# Altium PCB PCB2.PcbDoc
Units mil, origin at the board's own origin, x right, y up, seen from the top; angles counter-clockwise.
Board outline 1610.03 x 1165.03 mil, 2 copper layers (Top Layer, Bottom Layer); 17 components, 12 nets, 50 pads, 0 vias.
Unrouted connection lines stored in the file: 2.
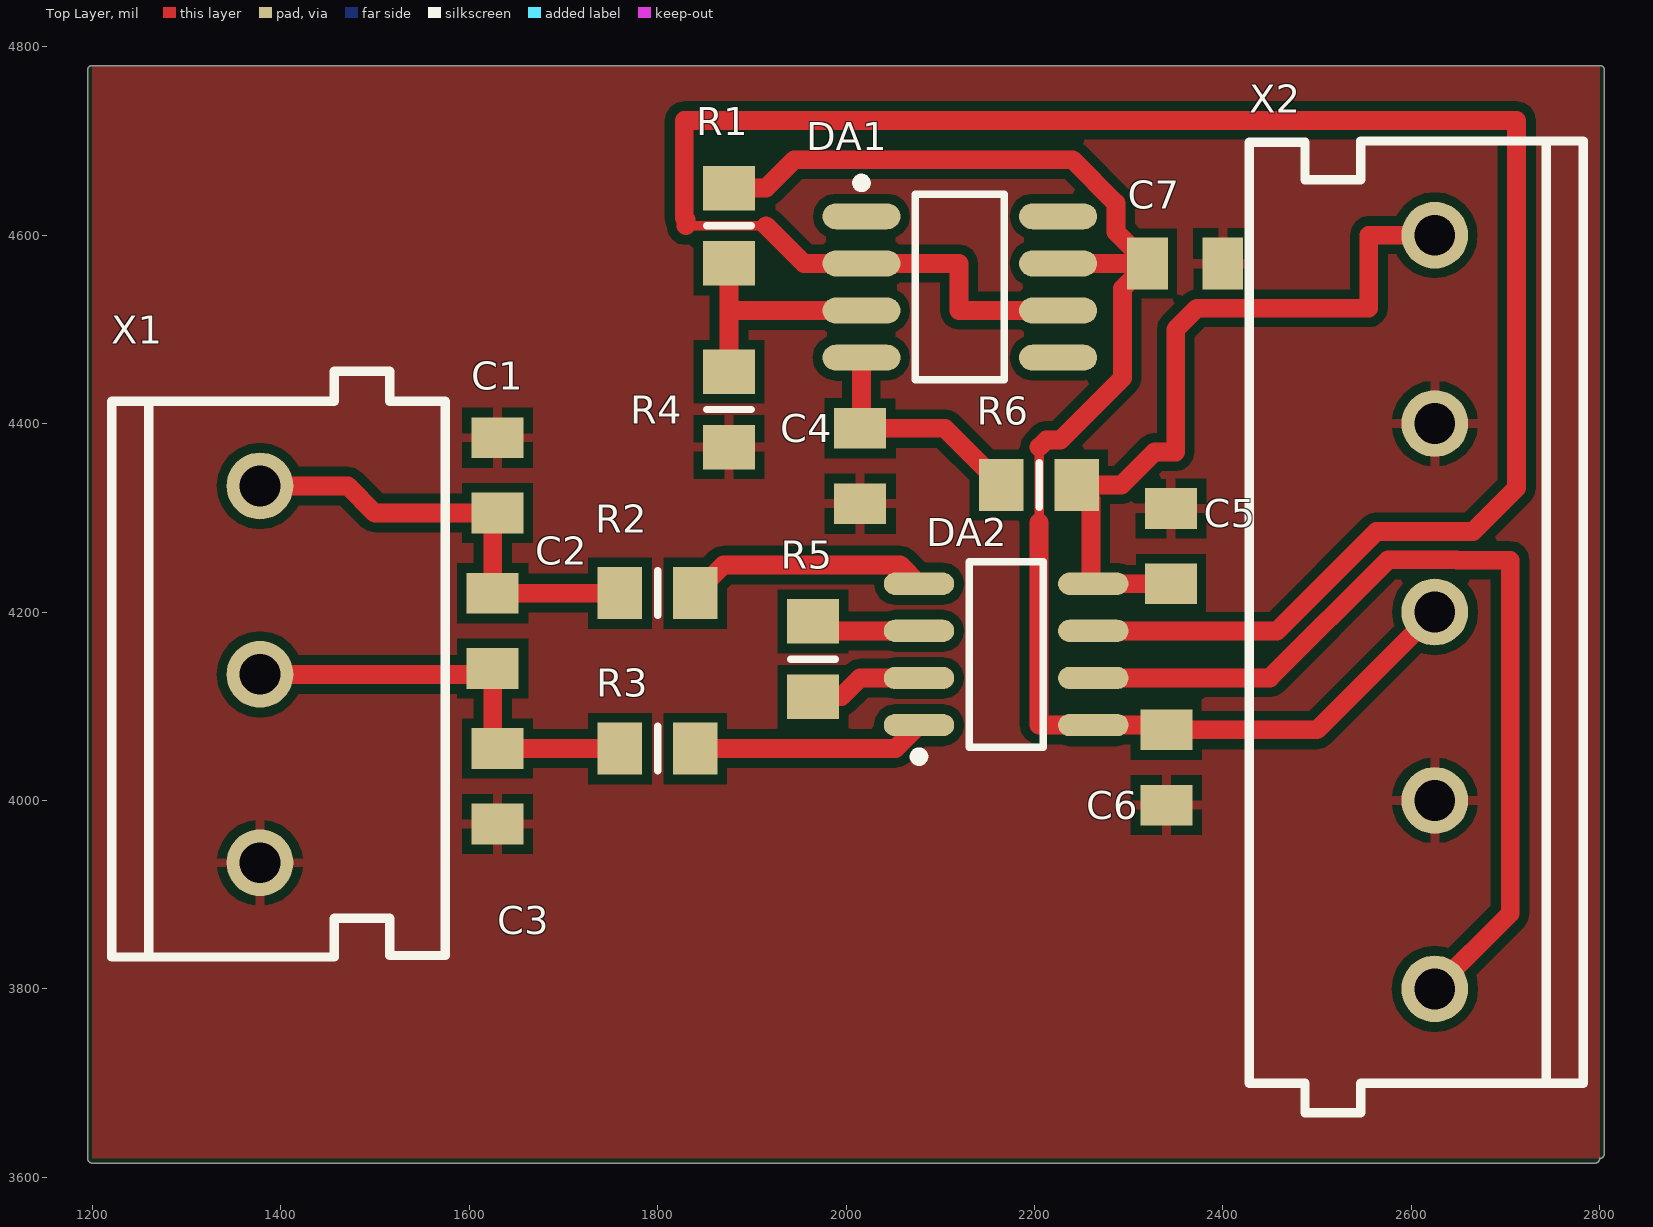
[diagram p0: Top Layer view]
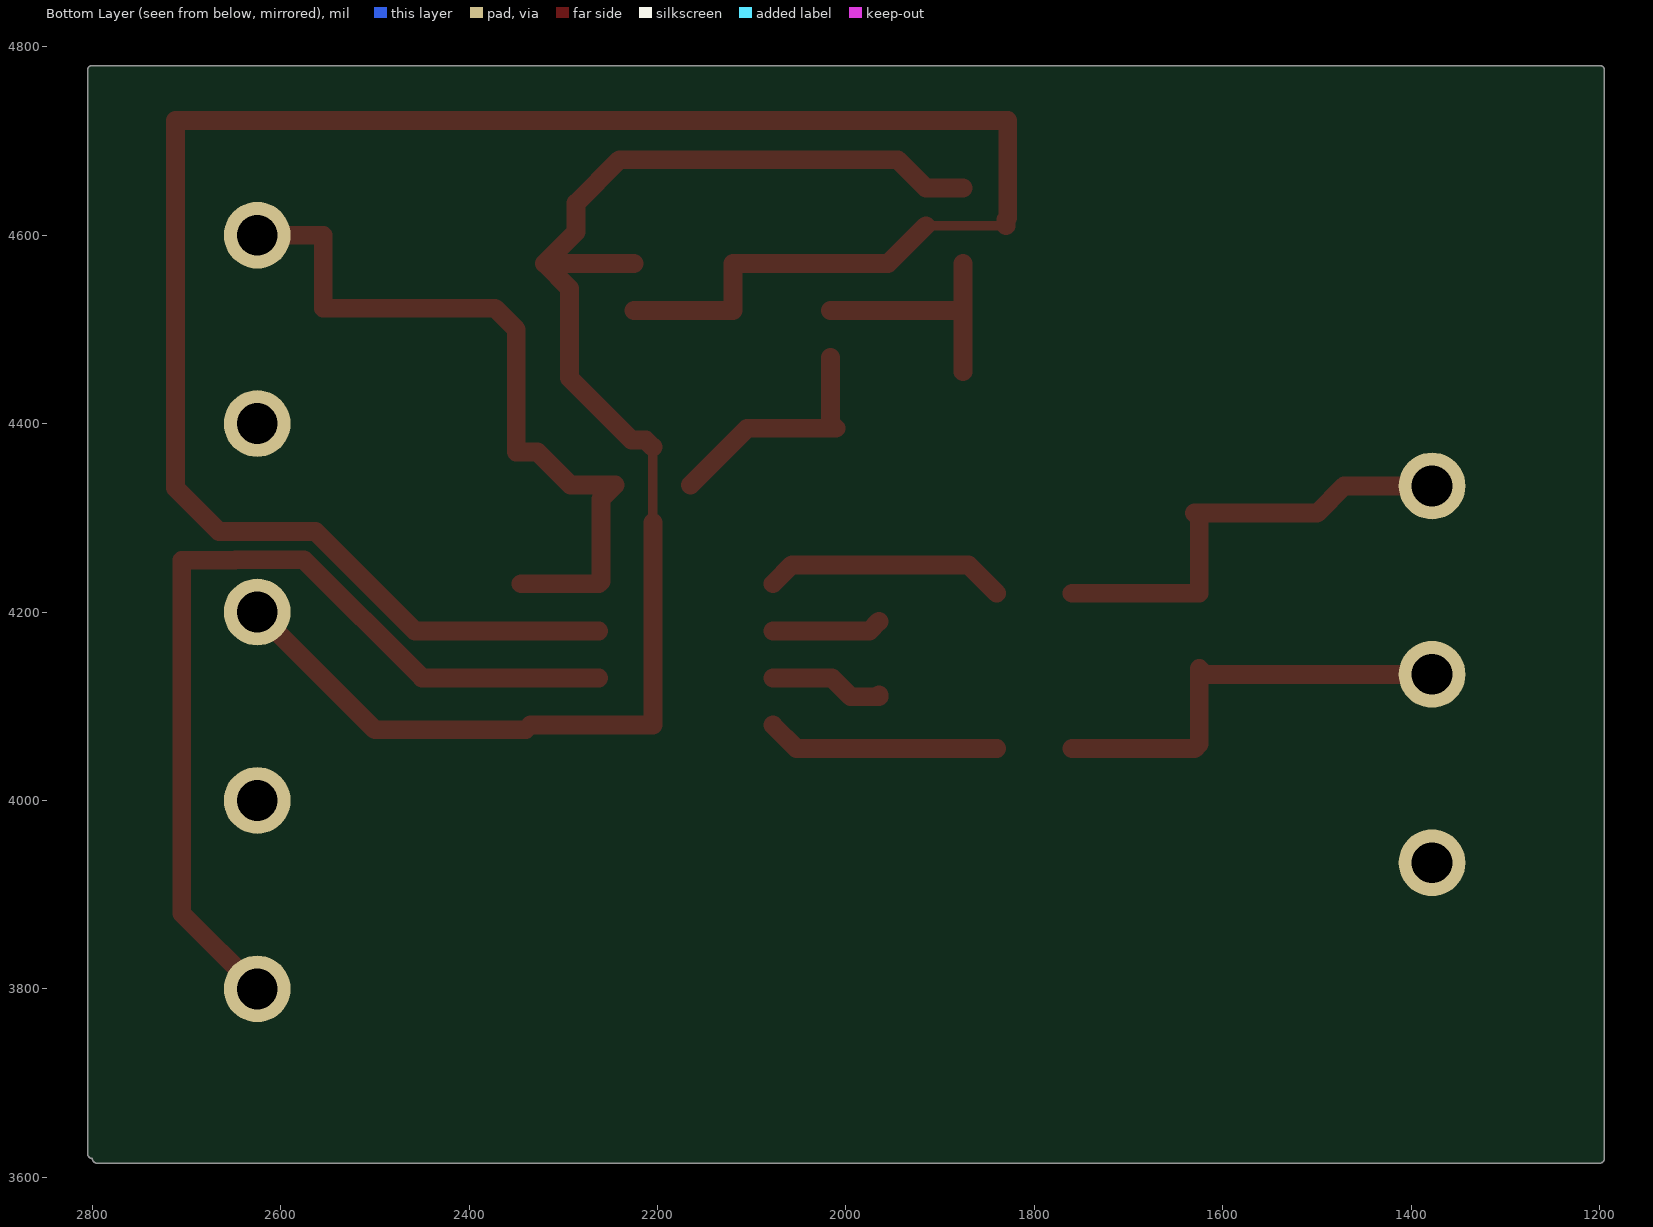
[diagram p1: Bottom Layer view, seen from below]
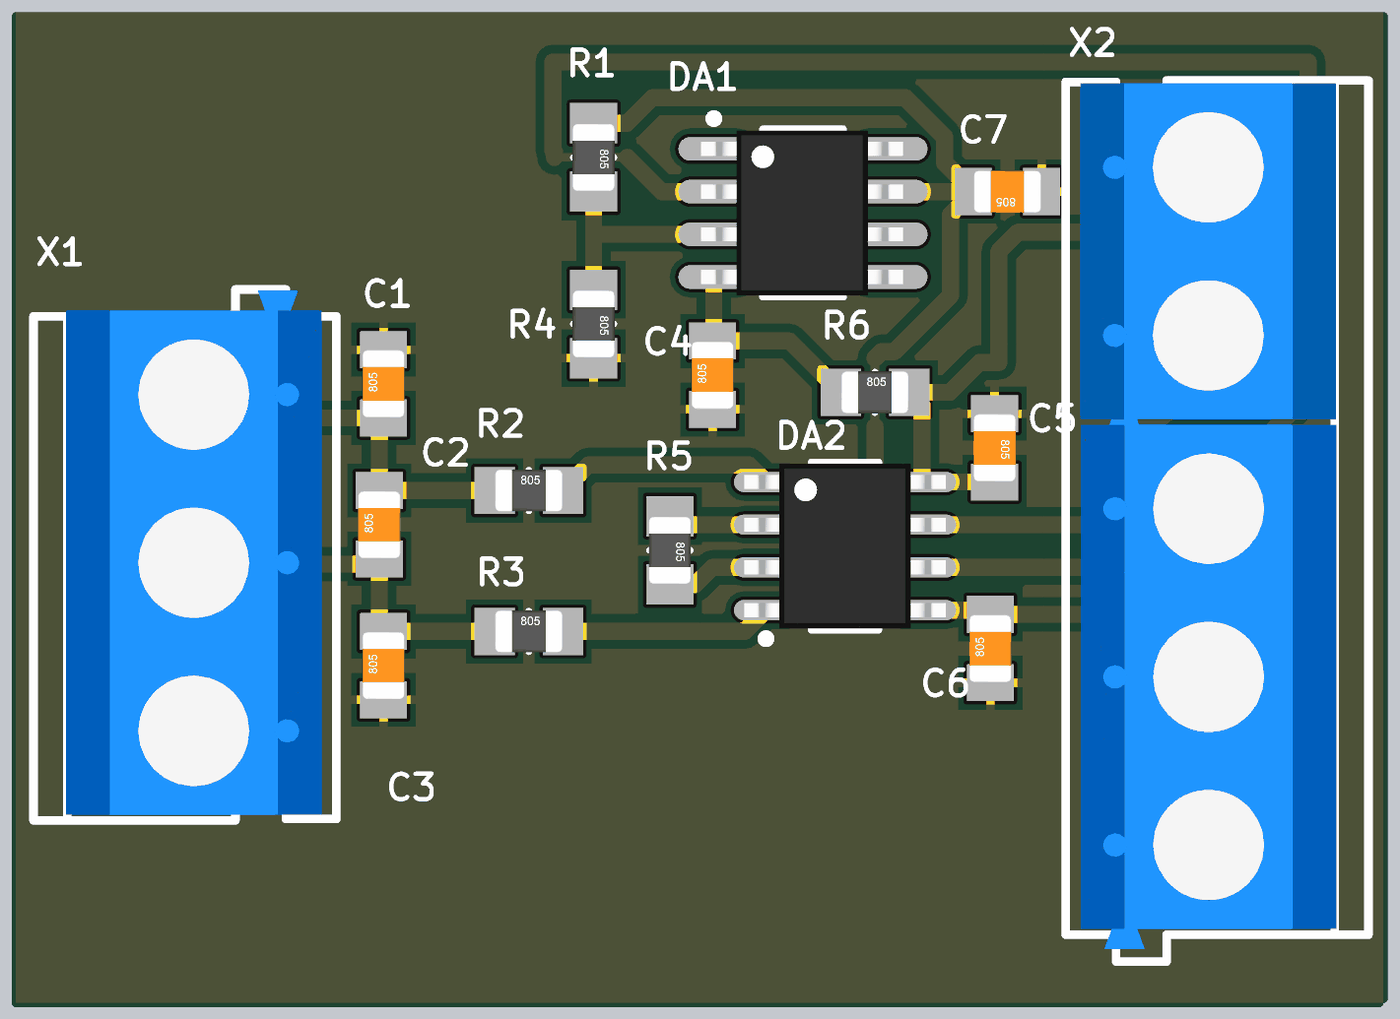
[diagram p2: 3D render of the assembled board from above, using the file's embedded part models]

## Layer stack, top to bottom
Top Solder: solder mask 0.4, Solder Resist, Dk 3.5
Top Layer: signal copper 1.4
Dielectric 1: dielectric 12.6, FR-4, Dk 4.8
Bottom Layer: signal copper 1.4
Bottom Solder: solder mask 0.4, Solder Resist, Dk 3.5

## Board outline
1200,3614.99 cw(c1200,3620) 1194.98,3620 1194.98,4775 cw(c1200,4775) 1200,4780.02 2800,4780.02 cw(c2800,4775) 2805.01,4775 2805.01,3625 cw(c2800,3625) 2800.01,3619.99 cw(c2795,3620) 2795,3614.99

## Design rules (kind name [scope] priority, off if disabled: settings)
Clearance [All] p1: gap=10 ignorepadtopadclearanceinfootprint=FALSE except(0: Arc-Hole Track-Hole SMDPad-Hole THPad-Hole Via-Hole Fill-Hole Poly-Hole Region-Hole Text-Hole)
PolygonConnect [All] p1: connectstyle=Relief reliefconductorwidth=10 reliefentries=4 polygonreliefangle="90 Angle" airgapwidth=10
RoutingVias [All] p1: holewidth=28 width=50 viastyle="Through Hole" minholewidth=28 minwidth=50 maxholewidth=28 maxwidth=50
SolderMaskExpansion [All] p1: expansion=4
Width [All] p1: maxlimit=100 minlimit=10 preferedwidth=20
30 further rules are at their usual default settings.

## Components (designator, comment, footprint, x,y, rotation, side; value= is the part's Value field where it differs from the comment)
C1 "10pF" CAPC2012L-С0805 1630,4345 r90 top value="0,1 мкФ"
C2 "100pF" CAPC2012L-С0805 1625,4180 r90 top value="0,1 мкФ"
C3 "10pF" CAPC2012L-С0805 1630,4015 r90 top value="0,1 мкФ"
C4 "0.1pF" CAPC2012L-С0805 2015,4355 r90 top value="0,1 мкФ"
C5 "0.1pF" CAPC2012L-С0805 2345,4270 r270 top value="0,1 мкФ"
C6 "0.1pF" CAPC2012L-С0805 2340,4035 r90 top value="0,1 мкФ"
C7 "0.1pF" CAPC2012L-С0805 2360,4570 r180 top value="0,1 мкФ"
DA1 "OP777" SOIC127P600-8BM 2120.79,4545 r0 top
DA2 "AD8227" SO-8_L 2170,4155 r0 top
R1 "1.5 кОм" RESC2012N 1875.79,4610 r270 top value=1кОм
R2 "1кОм" RESC2012N 1800,4220 r0 top
R3 "1кОм" RESC2012N 1800,4055 r0 top
R4 "1 кОм" RESC2012N 1875.79,4415 r270 top value=1кОм
R5 "845 Ом" RESC2012N 1965,4150 r270 top value=1кОм
R6 "0" RESC2012N 2205,4335 r0 top value="0 Ом"
X1 "KLEMMNIK3" KL3 1377.95,3933.86 r90 top
X2 "KLEMMNIK5" KLEMNIK5 2625,4600 r270 top

## Footprints (in the part's own frame and the unit in brackets; to place one, negate y for a bottom-side part, rotate by r counter-clockwise, add the part's x,y. Pads: shape width x height; smd on the part's side, far side on the other; paste and mask are expansions set on the pad)
CAPC2012L-С0805 [mm] "Chip Capacitor, Body 2.0x1.3mm, IPC High Density"
  rect 1.1x1.4 smd: 1(-1.016,0) 2(1.016,0)
  body extent -1,-0.62 1,0.63, height 0.78
KL3 [mm]
  round 1.8 hole 1.1: 1(0,0) 2(5.08,0) 3(10.16,0)
  silkscreen extent -2.54,-5 13.25,4, body extent -2.38,-4.56 13.22,3.04, height 10
KLEMNIK5 [mm]
  round 1.8 hole 1.1: 1(0,0) 2(5.08,0) 3(10.16,0) 4(15.24,0) 5(20.32,0)
  silkscreen extent -2.54,-5 23.66,4, body extent -2.46,-4.56 23.29,3.05, height 10
RESC2012N [mm] "Chip Resistor, Body 2.0x1.3mm, IPC Medium Density"
  rect 1.2x1.4 smd: 1(-1.016,0) 2(1.016,0)
  silkscreen extent 0,-0.6 0,0.6, body extent -1,-0.62 1,0.63, height 0.78
SO-8_L [mm] "8-Pin Small Outline Integrated Circuit 1.27 mm Pitch, IPC High Density"
  oval 1.9x0.6 smd: 1(-2.35,-1.905) 2(-2.35,-0.635) 3(-2.35,0.635) 4(-2.35,1.905) 5(2.35,1.905) 6(2.35,0.635) 7(2.35,-0.635) 8(2.35,-1.905)
  silkscreen extent -2.47,-2.88 1,2.5, body extent -3,-2.45 3,2.45, height 1.75
SOIC127P600-8BM [mm] "SOIC, 8-Leads, Body 4.9x3.9mm, Pitch 1.27mm, IPC Low Density"
  oval 2.1x0.7 smd: 1(-2.65,1.905) 2(-2.65,0.635) 3(-2.65,-0.635) 4(-2.65,-1.905) 5(2.65,-1.905) 6(2.65,-0.635) 7(2.65,0.635) 8(2.65,1.905)
  silkscreen extent -2.77,-2.5 1.2,2.93, body extent -3.02,-2.45 2.97,2.45, height 1.75

## Part data
C1 C2 C3 C4 C5 C6 C7: library part C0805, "планарный конденсатор"
DA1: "Precision Micropower  Single-Supply Operational Amplifiers"
DA2: "instrumentation amplifier"
R1 R2 R3 R4 R5 R6: library part R0805, "планарный резистор"

## Nets (pads, with @x,y where several pads share a name; then routed paths per layer and width w, separated by ;. In a path a pad name is that pad's centre, name@x,y a point inside that pad or via, vN(x,y) a via of type N, cw(c..) or ccw(c..) an arc to the next point about the centre after c; other vN are vias at no path point)
+5V: C6.2 C7.2 DA1.7 DA2.8 R1.1 X2.3 | length 1628.1
  Top Layer w10: 2205,4295 2205,4375
  Top Layer w20: R1.1 1915,4650 1945,4680 2240.45,4680 2286.46,4633.99 2286.46,4603.54 C7.2 ; 2205,4295 2205,4080 DA2.8 C6.2@2335,4080 ; 2205,4375 2212.56,4382.56 2227.56,4382.56 2293.35,4448.35 2293.35,4543.35 C7.2 ; DA1.7 C7.2 ; C6.2 2500,4075 X2.3
-5V: C4.2 C5.2 DA1.4 DA2.5 R6.1 R6.2 X2.1 | length 1062.5
  Top Layer w20: DA1.4 2016.46,4400.67 2010.79,4395 C4.2 2105,4395 R6.1 ; C5.2 DA2.5 2260,4232.52 2260,4320 R6.2 2292.5,4335 2327.5,4370 2350,4370 2350,4500 2372.43,4522.43 2554.92,4522.43 2554.92,4600 X2.1
GND: C1.2 C3.1 C4.1 C5.1 C6.1 C7.1 R4.2 X1.1 X2.2 X2.4
in+: C1.1 C2.2 R2.1 X1.3 | length 486.1
  Top Layer w20: X1.3 1471.14,4333.86 1500,4305 C1.1 1625,4300 C2.2 R2.1
in-: C2.1 C3.2 R3.1 X1.2 | length 466.7
  Top Layer w20: X1.2 1618.86,4133.86 C2.1 1625,4060 C3.2 R3.1
NetDA1_2: DA1.2 DA1.6 DA2.6 | length 2359.9
  Top Layer w10: 1830,4610 1915.25,4610
  Top Layer w20: 1830,4610 1830,4616.32 1828.23,4618.09 1828.23,4721.77 2711.77,4721.77 2711.77,4331.77 2665.43,4285.43 2563.01,4285.43 2457.57,4180 DA2.6 ; 1915.25,4610 1955.25,4570 DA1.2 2120,4570 2120,4520 DA1.6
NetDA1_3: DA1.3 R1.2 R4.1 | length 257.7
  Top Layer w20: R4.1 1875.79,4515 ; R1.2 1875.79,4515 ; DA1.3 1880.79,4520 1875.79,4515
NetDA2_1: DA2.1 R3.2 | length 247.8
  Top Layer w20: R3.2 2052.48,4055 DA2.1
NetDA2_2: DA2.2 R5.2 | length 122.6
  Top Layer w20: R5.2@1965,4111.81 R5.2 1995,4110 2015,4130 DA2.2
NetDA2_3: DA2.3 R5.1 | length 116.6
  Top Layer w20: R5.1 1975,4180 DA2.3
NetDA2_4: DA2.4 R2.2 | length 258.2
  Top Layer w20: R2.2 1870,4250 2057.48,4250 DA2.4
out: DA2.7 X2.5 | length 982.8
  Top Layer w20: DA2.7 2450,4130 2575.43,4255.43 2647.96,4255.43 2648.39,4255 2705,4255 2705,3880 X2.5
pads on no net: DA1.1 DA1.5 DA1.8

## Polygon pours and split planes (outlines as drawn)
GND on Top Layer (solid, pour order 8): 1200,4780 2800,4780 2800,3620 1200,3620
no net on Top Layer (solid, pour order 0): 1555,4905

## Silkscreen, mask and mechanical layers (free items; w line width, h text height)
Mechanical 9:
  lines w10: 1200,3620 2795,3620 2800,3625 2800,4775 1200,4775 1200,3620